# EAGLE board I2C_WEB (EAGLE 5.09)
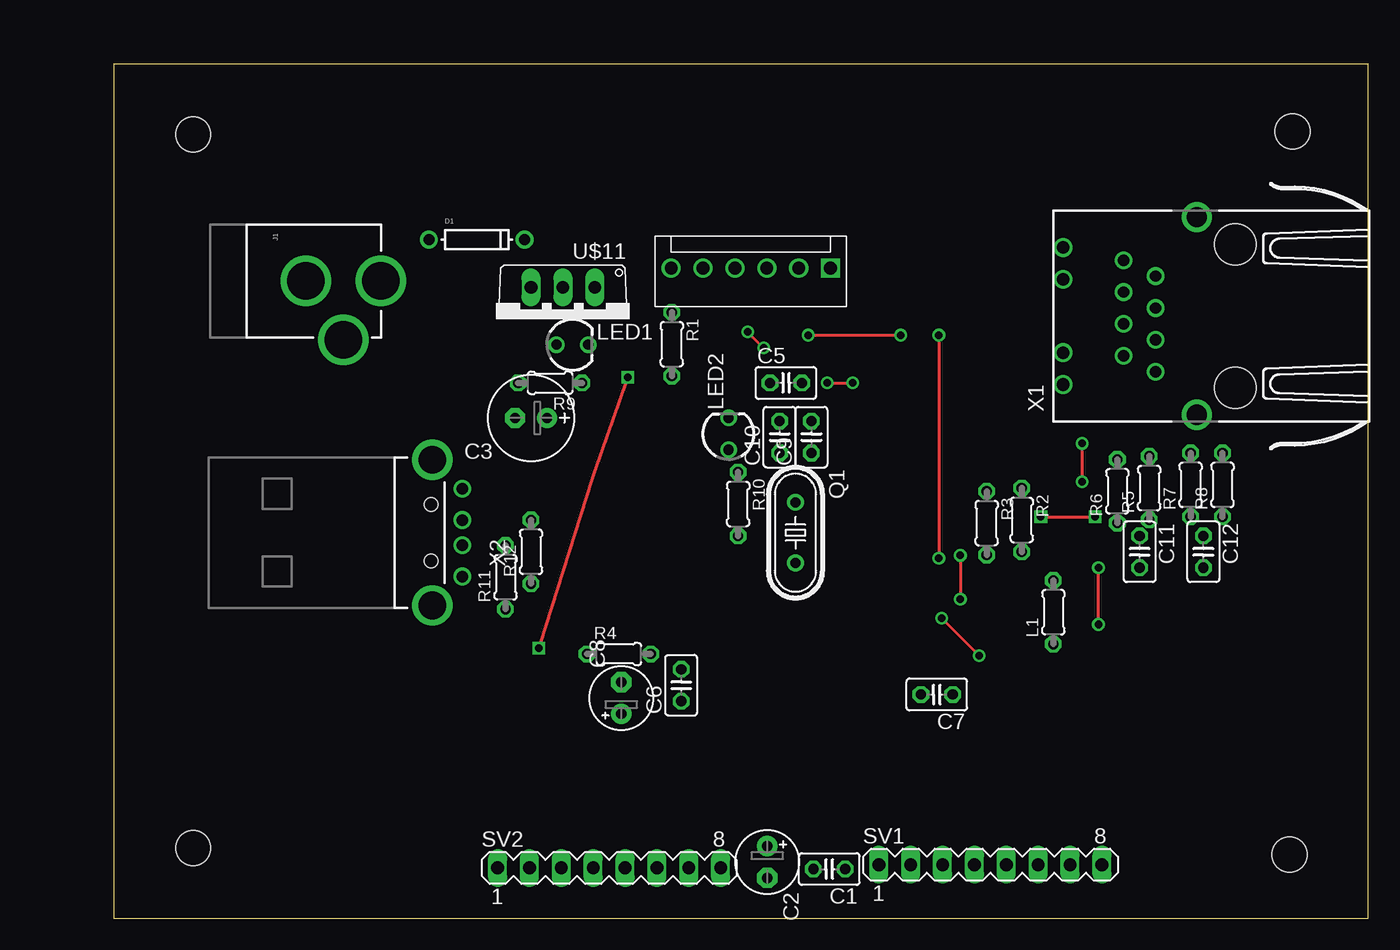
[diagram p0: board, top side]
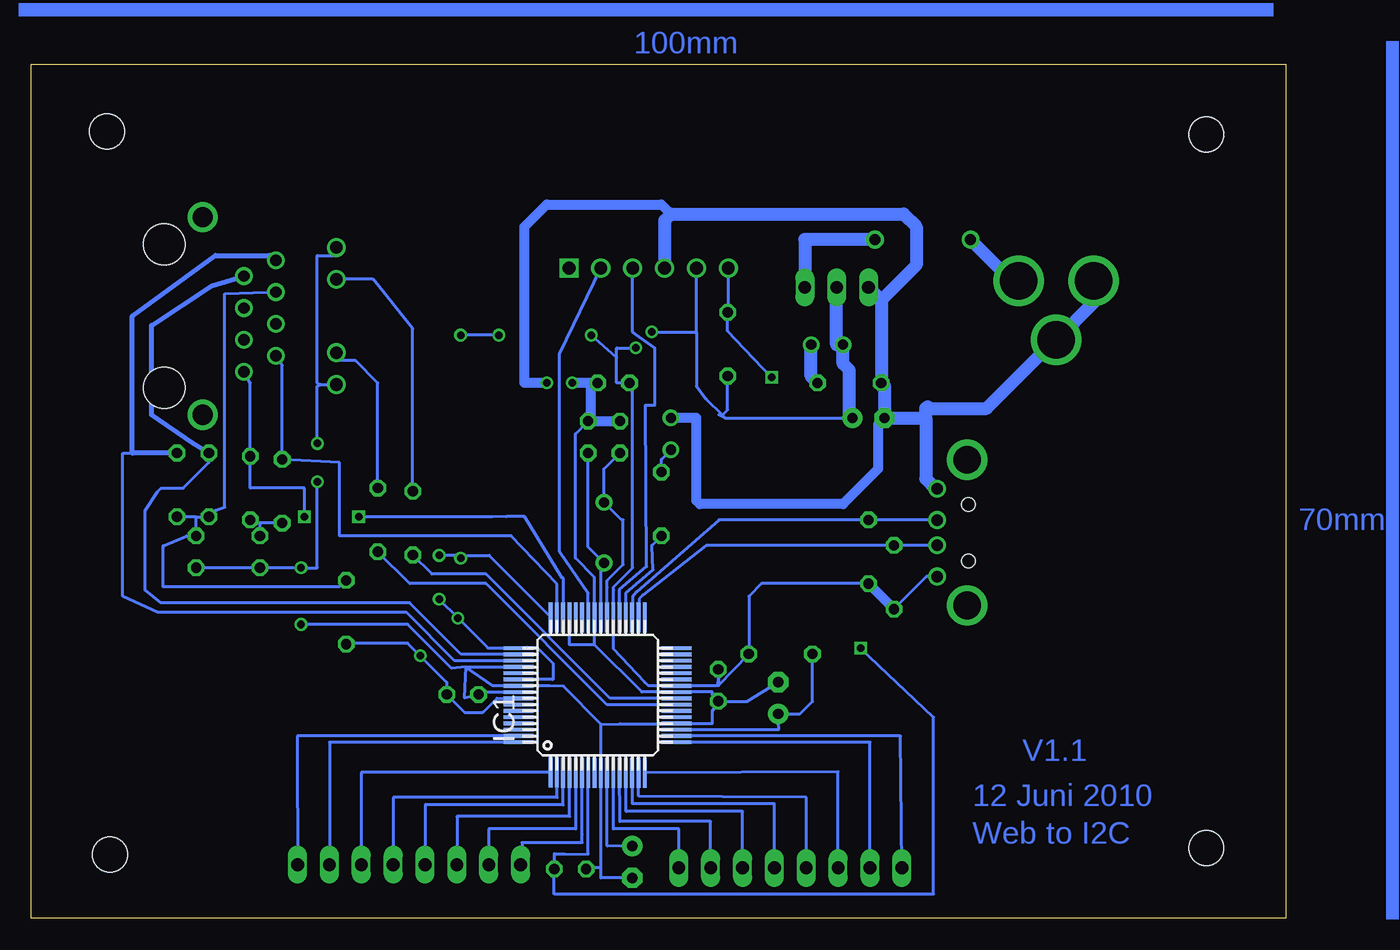
[diagram p1: board, bottom side, seen from below]

Size 100 x 68.06 mm. Coordinates in mm from the lower left corner, seen from the top.
Outline: 0,0 100,0 100,68.06 0,68.06 0,0
Copper layers (1*16): Top 0.035mm / dielectric 1.5mm / Bottom 0.035mm
Design rules "default": minimum track width 10mil, minimum drill 24mil, track to track 8mil, track to pad 8mil, pad to pad 8mil, via to via 8mil, smd to smd 8mil, copper to edge 40mil, drill to drill 8mil, minimum pad ring 10mil, minimum via ring 8mil, stop-mask expansion 4mil, vias tented up to drill 0mil, thermal gap 10mil
Holes 2.8 mm at 6.35,62.48 93.98,62.72 93.73,5.08 6.35,5.59

## Footprints (pad centres in the part's own frame; a part is rotated, then mirrored left to right if it is on the bottom)
C025-025X050 = drill 0.813 octagon: 1 -1.27,0; 2 1.27,0
E2,5-5 = drill 0.813 pad 1.6 round: + -1.27,0 | drill 0.813 pad 1.6 octagon: - 1.27,0
E2,5-7 = drill 0.813 pad 1.6 round: + -1.27,0 | drill 0.813 pad 1.6 octagon: - 1.27,0
DIODE-1N4148 = drill 0.9 round: A -3.81,0; C 3.81,0
TQFP64-10X10-LONG = smd 2.4 x 0.3: 1 -7.426,3.757; 2 -7.433,3.25; 3 -7.47,2.75; 4 -7.47,2.25; 5 -7.47,1.75; 6 -7.47,1.25; 7 -7.47,0.75; 8 -7.47,0.25; 9 -7.47,-0.25; 10 -7.47,-0.75; 11 -7.47,-1.25; 12 -7.47,-1.75; 13 -7.47,-2.25; 14 -7.47,-2.75; 15 -7.47,-3.25; 16 -7.47,-3.75; 33 4.93,-3.75; 34 4.93,-3.25; 35 4.93,-2.75; 36 4.93,-2.25; 37 4.93,-1.75; 38 4.93,-1.25; 39 4.93,-0.75; 40 4.93,-0.25; 41 4.93,0.25; 42 4.93,0.75; 43 4.93,1.25; 44 4.93,1.75; 45 4.93,2.25; 46 4.93,2.75; 47 4.93,3.25; 48 4.93,3.75 | smd 0.3 x 2.4: 17 -5.02,-6.3; 18 -4.52,-6.3; 19 -4.02,-6.3; 20 -3.52,-6.3; 21 -3.02,-6.3; 22 -2.52,-6.3; 23 -2.02,-6.3; 24 -1.52,-6.3; 25 -1.02,-6.3; 26 -0.52,-6.3; 27 -0.02,-6.3; 28 0.48,-6.3; 29 0.98,-6.3; 30 1.48,-6.3; 31 1.98,-6.3; 32 2.481,-6.284; 49 2.48,6.3; 50 1.98,6.3; 51 1.48,6.3; 52 0.98,6.3; 53 0.48,6.3; 54 -0.02,6.3; 55 -0.52,6.3; 56 -1.02,6.3; 57 -1.52,6.3; 58 -2.02,6.3; 59 -2.52,6.3; 60 -3.02,6.3; 61 -3.52,6.3; 62 -4.02,6.3; 63 -4.52,6.3; 64 -5.02,6.3
POWER_JACK_PTH = drill 2.997 round: GND 0,7.7; GNDBREAK 4.7,10.7; PWR 0,13.7
0204/5 = drill 0.813 octagon: 1 -2.54,0; 2 2.54,0
LED3MM = drill 0.813 round: A -1.27,0; K 1.27,0
HC49/S = drill 0.813 round: 1 -2.413,0; 2 2.413,0
MA08-1 = drill 1.016 long: 1 -8.89,0; 2 -6.35,0; 3 -3.81,0; 4 -1.27,0; 5 1.27,0; 6 3.81,0; 7 6.35,0; 8 8.89,0
MOLEX-1X6 = drill 1.016 square: 1 0,0 | drill 1.016 round: 2 2.54,0; 3 5.08,0; 4 7.62,0; 5 10.16,0; 6 12.7,0
TO220V = drill 1.016 long: 1 -2.54,-2.54; 2 0,-2.54; 3 2.54,-2.54
J1 = drill 0.9 pad 1.3 round: 1 4.445,2.54; 2 3.175,0; 3 1.905,2.54; 4 0.635,0; 5 -0.635,2.54; 6 -1.905,0; 7 -3.175,2.54; 8 -4.445,0 | drill 1 pad 1.422 round: 9 5.465,7.37; 10 2.925,7.37; 11 -2.925,7.37; 12 -5.465,7.37 | drill 1.6 pad 2.184 round: M1 -7.875,-3.3; M2 7.875,-3.3 | hole 3.3: 5.715,-6.35; -5.715,-6.35
USB-A-H = drill 0.914 round: D+ 2.4,1; D- 2.4,-1; GND 2.4,3.5; VBUS 2.4,-3.5 | drill 2.2 round: GND@1 0,5.8; GND@2 0,-5.8 | hole 1.1: -0.1,2.25; -0.1,-2.25

## Placement (x,y rotation side)
C1  [C025-025X050]  57.05,3.92 180 top
C2  10µ  [E2,5-5]  52.1,4.48 270 top
C3  [E2,5-7]  33.27,39.88 180 top
C5  [C025-025X050]  53.59,42.67 0 top
C6  [C025-025X050]  45.25,18.57 90 top
C7  [C025-025X050]  65.62,17.83 180 top
C8  10µ  [E2,5-5]  40.47,17.55 90 top
C9  [C025-025X050]  55.63,38.35 90 top
C10  [C025-025X050]  53.09,38.35 90 top
C11  [C025-025X050]  81.79,29.21 270 top
C12  [C025-025X050]  86.87,29.21 270 top
D1  [DIODE-1N4148]  28.96,54.1 0 top
IC1  PIC18F6J6  [TQFP64-10X10-LONG]  54.86,19.05 90 bottom
J1  POWER_JACKPTH  [POWER_JACK_PTH]  7.62,50.8 270 top
L1  [0204/5]  74.91,24.39 90 top
LED1  [LED3MM]  36.58,45.72 0 top
LED2  [LED3MM]  49.02,38.61 90 top
Q1  25MHz  [HC49/S]  54.36,30.73 270 top
R1  [0204/5]  44.5,45.76 270 top
R2  [0204/5]  72.39,31.75 270 top
R3  [0204/5]  69.6,31.5 270 top
R4  [0204/5]  40.28,21.06 0 top
R5  [0204/5]  82.55,34.29 90 top
R6  [0204/5]  80.01,34.04 90 top
R7  [0204/5]  85.85,34.54 90 top
R8  [0204/5]  88.39,34.54 90 top
R9  [0204/5]  34.8,42.67 180 top
R10  [0204/5]  49.78,33.02 270 top
R11  [0204/5]  31.24,27.18 90 top
R12  [0204/5]  33.27,29.21 90 top
SV1  [MA08-1]  69.9,4.26 0 top
SV2  [MA08-1]  39.5,4.01 0 top
U$1  PIC-ICSP  [MOLEX-1X6]  57.15,51.82 180 top
U$11  LD1117  [TO220V]  35.81,47.75 180 top
X1  J1011F21P  [J1]  83.06,48.01 90 top
X2  USB-A-H  [USB-A-H]  25.4,30.73 0 top

## Library data of the parts
C1-C3 C5-C12 L1 R1-R12 = rcl
D1 J1 X2 = SparkFun
IC1 LED1 LED2 U$1 U$11 = 1.MyLibrary
Q1 = crystal
SV1 SV2 = con-lstb
X1 = con-pulse

## Nets
+3,3V: C3.+ C5.1 C6.2 C7.1 IC1.26 IC1.38 IC1.48 IC1.49 IC1.54 IC1.57 L1.1 LED1.A R1.2 R4.2 R11.1 R12.1 U$1.5 U$11.2 X2.VBUS
GND: C1.2 C2.- C3.- C5.2 C6.1 C7.2 C8.- C9.2 C10.2 C11.2 C12.2 IC1.9 IC1.20 IC1.25 IC1.41 IC1.45 IC1.52 IC1.55 IC1.56 J1.GND J1.GNDBREAK LED2.K R9.2 U$1.4 U$11.3 X1.9 X1.12 X2.GND
LEDA: IC1.24 R3.2
LEDB: IC1.23 R2.2
N$1: IC1.51 R8.2 X1.1
N$2: IC1.50 R7.2 X1.2
N$3: IC1.47 R6.2 X1.7
N$4: IC1.46 R5.2 X1.8
N$5: IC1.37 U$1.3
N$6: IC1.42 U$1.2
N$7: IC1.35 R12.2 X2.D+
N$8: IC1.34 R11.2 X2.D-
N$9: C1.1 IC1.7 R1.1 U$1.6
N$10: C2.+ IC1.10
N$11: R2.1 X1.11
N$12: R3.1 X1.10
N$13: C9.1 IC1.40 Q1.2
N$14: C8.+ IC1.19 R4.1
N$15: C10.1 IC1.39 Q1.1
N$16: LED1.K R9.1
N$17: C12.1 L1.2 R7.1 R8.1 X1.3
N$18: C11.1 R5.1 R6.1
N$19: LED2.A R10.1
N$20: D1.C U$11.1
N$21: D1.A J1.PWR
N$22: IC1.36 R10.2
N$23: IC1.6 SV1.1
N$24: IC1.5 SV1.2
N$25: IC1.4 SV1.3
N$26: IC1.3 SV1.4
N$27: IC1.2 SV1.5
N$28: IC1.1 SV1.6
N$29: IC1.16 SV2.3
N$30: IC1.15 SV2.4
N$31: IC1.14 SV2.5
N$32: IC1.13 SV2.6
N$33: IC1.12 SV2.7
N$34: IC1.11 SV2.8
N$35: IC1.17 SV2.2
N$36: IC1.18 SV2.1
N$37: IC1.63 SV1.8
N$38: IC1.64 SV1.7

## Tracks (layer width: path | path; a pad name or v marks a point on that pad's centre or on a via)
+3,3V  (via drill 0.6)
  Top 0.254: v51.82,45.47 v50.55,46.74 | v55.37,46.48 v62.74,46.48 | v65.79,46.48 v65.79,28.7 | v66,23.92 v69,20.92 | v67.5,28.92 v67.5,25.42
  Bottom 0.254: X2.VBUS 28.65,27.23 R11.1 | 44.92,40.1 46.23,41.4 46.99,42.42 46.99,46.74 | 44.92,40.1 44.7,39.88 | 44.7,39.88 45.21,40.13 | 46.99,46.74 U$1.5 | 44.7,39.88 C3.+ | 53.34,44.7 53.34,42.67 C5.1 52.07,42.42 52.07,27.94 53.59,26.42 53.59,26.16 53.61,26.14 IC1.38 53.59,21.46 51.09,18.8 50.83,18.53 IC1.26 45.33,18.53 C6.2 45.22,18.54 R4.2 42.82,25.67 41.82,26.67 R12.1 | 53.34,44.7 53.34,45.47 v51.82,45.47 | v50.55,46.74 46.99,46.74 | 53.34,44.7 v55.37,46.48 | v65.79,28.7 65.79,28.96 | v62.74,46.48 v65.79,46.48 | v65.79,28.7 66.04,28.45 | IC1.57 62.89,17.53 64,16.42 65.48,16.42 C7.1 66.89,18.81 v69,20.92 70,21.92 74.84,21.92 L1.1 | 65.57,28.92 63.5,28.92 58.61,24.03 IC1.48 | v65.79,28.7 65.57,28.92 | 65.57,28.92 v67.5,28.92 | v67.5,25.42 v66,23.92 63.61,21.53 IC1.49 60.5,21.59 59.69,21.59 58.42,20.32 58.42,19.05 58.44,19.03 IC1.54 | R1.2 44.5,40.52 44.92,40.1
  Bottom 0.813: R11.1 R12.1
  Bottom 1.016: C3.+ 34.8,40.13 34.8,43.69 35.31,44.2 LED1.A 35.81,45.72 U$11.2
GND  (via drill 0.6)
  Top 0.254: v77.22,34.8 v77.22,37.85 | v56.9,42.67 v58.93,42.67 | C11.2 82,27.92 | v78.5,23.42 v78.5,27.94
  Bottom 0.254: C12.2 C11.2 v78.5,27.94 77.22,27.94 v77.22,34.8 | 55.12,21.8 51.34,18.03 IC1.25 45.72,18.03 45.72,17.78 C6.1 | 55.12,21.8 55.12,23.48 IC1.41 55.11,27.17 56.64,28.7 56.64,38.61 C9.2 | C9.2 55.63,39.88 | 76.96,42.54 X1.12 | 76.96,42.54 77.08,42.54 77.22,42.67 77.22,52.83 75.81,52.83 X1.9 | 54.59,15.46 53.09,15.49 49.2,15.49 IC1.20 45.72,15.53 45.72,16.51 C6.1 | 54.59,15.46 54.61,13.97 IC1.9 54.6,4.02 | 54.59,15.46 57.56,18.49 58.67,18.53 IC1.55 63.21,18.53 65.4,20.02 | C9.2 55.37,39.88 | v77.22,37.85 77.22,42.42 76.96,42.54 | 55.37,42.67 C5.2 | 46.74,33.02 46.99,33.27 | C3.- 32.51,39.37 | IC1.45 57.11,21.8 55.12,21.8 | C6.1 42.95,17.3 C8.- | IC1.52 64.5,20.03 65.4,20.02 | 65.4,20.02 65.5,17.58 C7.2 64.15,18.03 IC1.56 | v78.5,23.42 70,23.42 66.5,19.92 65.4,20.02 | 54.6,4.02 55.78,4.02 C1.2 | C2.- 54.6,3.21 54.6,4.02
  Bottom 0.813: C9.2 C10.2 | 55.37,39.88 55.37,42.67 v56.9,42.67 | v58.93,42.67 60.71,42.67 60.71,55.12 58.93,56.9 49.78,56.9 49.02,56.13 | LED2.K 46.99,39.88 46.99,33.27 | 46.74,33.02 35.31,33.02 32.51,35.81 32.51,39.37
  Bottom 1.016: J1.GND 15.32,49.1 J1.GNDBREAK 18.42,46.1 23.88,40.64 28.45,40.64 28.57,40.77 28.7,40.64 28.7,39.88 | X2.GND 27.88,34.23 28.7,35.05 28.7,39.88 | 28.7,39.88 C3.- 32,42.42 R9.2 32.26,49.28 | 32.26,49.28 U$11.3 | U$1.4 49.53,55.63 49.02,56.13 30.48,56.13 29.46,55.12 29.46,52.07 32.26,49.28
LEDA
  Bottom 0.254: 49.17,17.53 IC1.24 53.86,17.53 63.76,27.43 68.07,27.43 R3.2
LEDB
  Bottom 0.254: R2.2 69.85,26.67 63.76,26.67 54.11,17.02 49.18,17.02 IC1.23
N$1
  Bottom 0.254: IC1.51 66.25,20.53 70.1,24.38 89.92,24.38 92.71,25.65 92.71,37.08 R8.2
  Bottom 0.406: X1.1 80.39,52.96 81.03,52.83 85.34,52.83 91.95,48.01 91.95,37.08 R8.2
N$2
  Bottom 0.254: IC1.50 65.73,21.03 69.85,25.15 89.66,25.15 90.93,26.16 90.93,32.51 89.92,34.04 89.66,34.29 87.88,34.29 85.85,36.32 R7.2
  Bottom 0.406: X1.2 85.6,50.42 90.42,47.24 90.42,40.13 87.12,37.85 R7.2
N$3
  Bottom 0.254: X1.7 80.01,44.07 R6.2 75.44,36.32 75.44,30.48 61.75,30.48 58.11,26.64 IC1.47
N$4  (via drill 0.6)
  Top 0.254: v73.91,32 v78.23,32
  Bottom 0.254: X1.8 82.55,42.67 R5.2 82.55,34.29 78.23,34.29 v78.23,32 | IC1.46 57.61,24.09 57.6,24.1 57.6,27.12 57.7,27.12 60.7,32.02 62.13,32.02 63.25,32 v73.91,32
N$5
  Bottom 0.254: IC1.37 53.11,26.23 50.95,28.03 51.05,40.89 50.29,40.89 50.29,45.47 52.07,46.74 U$1.3
N$6
  Bottom 0.254: IC1.42 55.61,25.9 57.91,29.21 57.91,44.96 U$1.2
N$7
  Bottom 0.254: X2.D+ 33.26,31.73 R12.2 45.21,31.75 51.77,25.99 52.07,25.62 IC1.35
N$8
  Bottom 0.254: IC1.34 51.56,25.43 51.26,25.78 46.23,29.72 R11.2 31.23,29.73 X2.D-
N$9  (via drill 0.6)
  Top 0.254: v41,43.12 38.3,35.42 v33.9,21.52
  Bottom 0.254: IC1.7 55.61,5.11 57.5,5.12 58.3,5.14 C1.1 58.33,1.92 28.1,1.92 28.1,16.02 v33.9,21.52 | U$1.6 44.45,48.35 R1.1 44.5,46.82 v41,43.12
N$10
  Bottom 0.254: IC1.10 54.11,5.76 C2.+
N$11
  Bottom 0.254: R2.1 72.39,42.67 74.17,44.45 75.56,44.45 X1.11
N$12
  Bottom 0.254: X1.10 72.78,50.93 69.6,46.99 R3.1
N$13
  Bottom 0.254: IC1.40 54.61,23.48 54.61,27.94 54.36,28.19 Q1.2 55.63,29.59 C9.1
N$14
  Bottom 0.254: IC1.19 40.42,15.03 C8.+ 38.74,16.28 37.74,17.28 R4.1
N$15
  Bottom 0.254: C10.1 54.36,35.81 Q1.1 52.96,31.75 52.83,31.75 52.83,28.19 54.1,26.92 54.11,26.4 IC1.39
N$16
  Bottom 1.016: LED1.K 37.85,43.18 R9.1
N$17
  Bottom 0.254: 86.87,32 R7.1 85.34,32 85.34,32.51 84.58,32.77 84.58,49.78 81.15,49.91 X1.3 | 86.87,32 R8.1 | 86.87,32 C12.1 87.63,30.48 89.41,29.7 89.5,29.7 89.5,26.42 75.5,26.42 L1.2
N$18
  Bottom 0.254: 81.79,31.5 R5.1 | R6.1 81.79,31.5 | 81.79,31.5 C11.1
N$19
  Bottom 0.254: R10.1 49.78,36.58 LED2.A
N$20
  Bottom 1.016: D1.C 38.35,54.1 U$11.1
N$21
  Bottom 1.016: J1.PWR 21.84,50.8 D1.A
N$22
  Bottom 0.254: IC1.36 52.61,25.91 50.45,27.78 50.55,29.72 R10.2
N$23
  Bottom 0.254: IC1.6 56.1,6.68 56.1,6.02 60.91,6.02 SV1.1
N$24
  Bottom 0.254: 56.64,12.05 IC1.5 56.6,7.12 63.55,7.12 SV1.2
N$25
  Bottom 0.254: IC1.4 57.1,8.12 66.09,8.12 SV1.3
N$26
  Bottom 0.254: SV1.4 68.6,9.06 68.5,9.02 57.61,9.02 IC1.3
N$27
  Bottom 0.254: IC1.2 58.1,9.62 71.17,9.62 SV1.5
N$28
  Bottom 0.254: IC1.1 73.71,11.62 SV1.6
N$29
  Bottom 0.254: IC1.16 35.69,11.68 SV2.3
N$30
  Bottom 0.254: IC1.15 51.6,9.72 38.23,9.62 SV2.4
N$31
  Bottom 0.254: IC1.14 52.1,9.12 40.77,9.12 SV2.5
N$32
  Bottom 0.254: IC1.13 52.6,8.52 43.31,8.52 SV2.6
N$33
  Bottom 0.254: IC1.12 53.1,7.98 53.1,7.72 45.85,7.72 SV2.7
N$34
  Bottom 0.254: IC1.11 53.6,7.28 53.6,7.12 48.39,7.12 SV2.8
N$35
  Bottom 0.254: IC1.17 33.15,14.03 SV2.2
N$36
  Bottom 0.254: IC1.18 30.71,14.53 SV2.1
N$37
  Bottom 0.254: SV1.8 78.8,13.32 78.8,14.52 61.2,14.52 IC1.63
N$38
  Bottom 0.254: IC1.64 76.25,14.03 SV1.7
(copper drawn outside any net)
  shapes: Bottom area x3

## Text on the board
Bottom: 100mm | 10x10mm | 70mm | V1.1 | 12 Juni 2010 | Web to I2C